# Altium PCB PCB1.PcbDoc
Units mm, origin at the board's own origin, x right, y up, seen from the top; angles counter-clockwise.
Board outline 50 x 50 mm, 2 copper layers (Top Layer, Bottom Layer); 19 components, 14 nets, 55 pads, 0 vias.
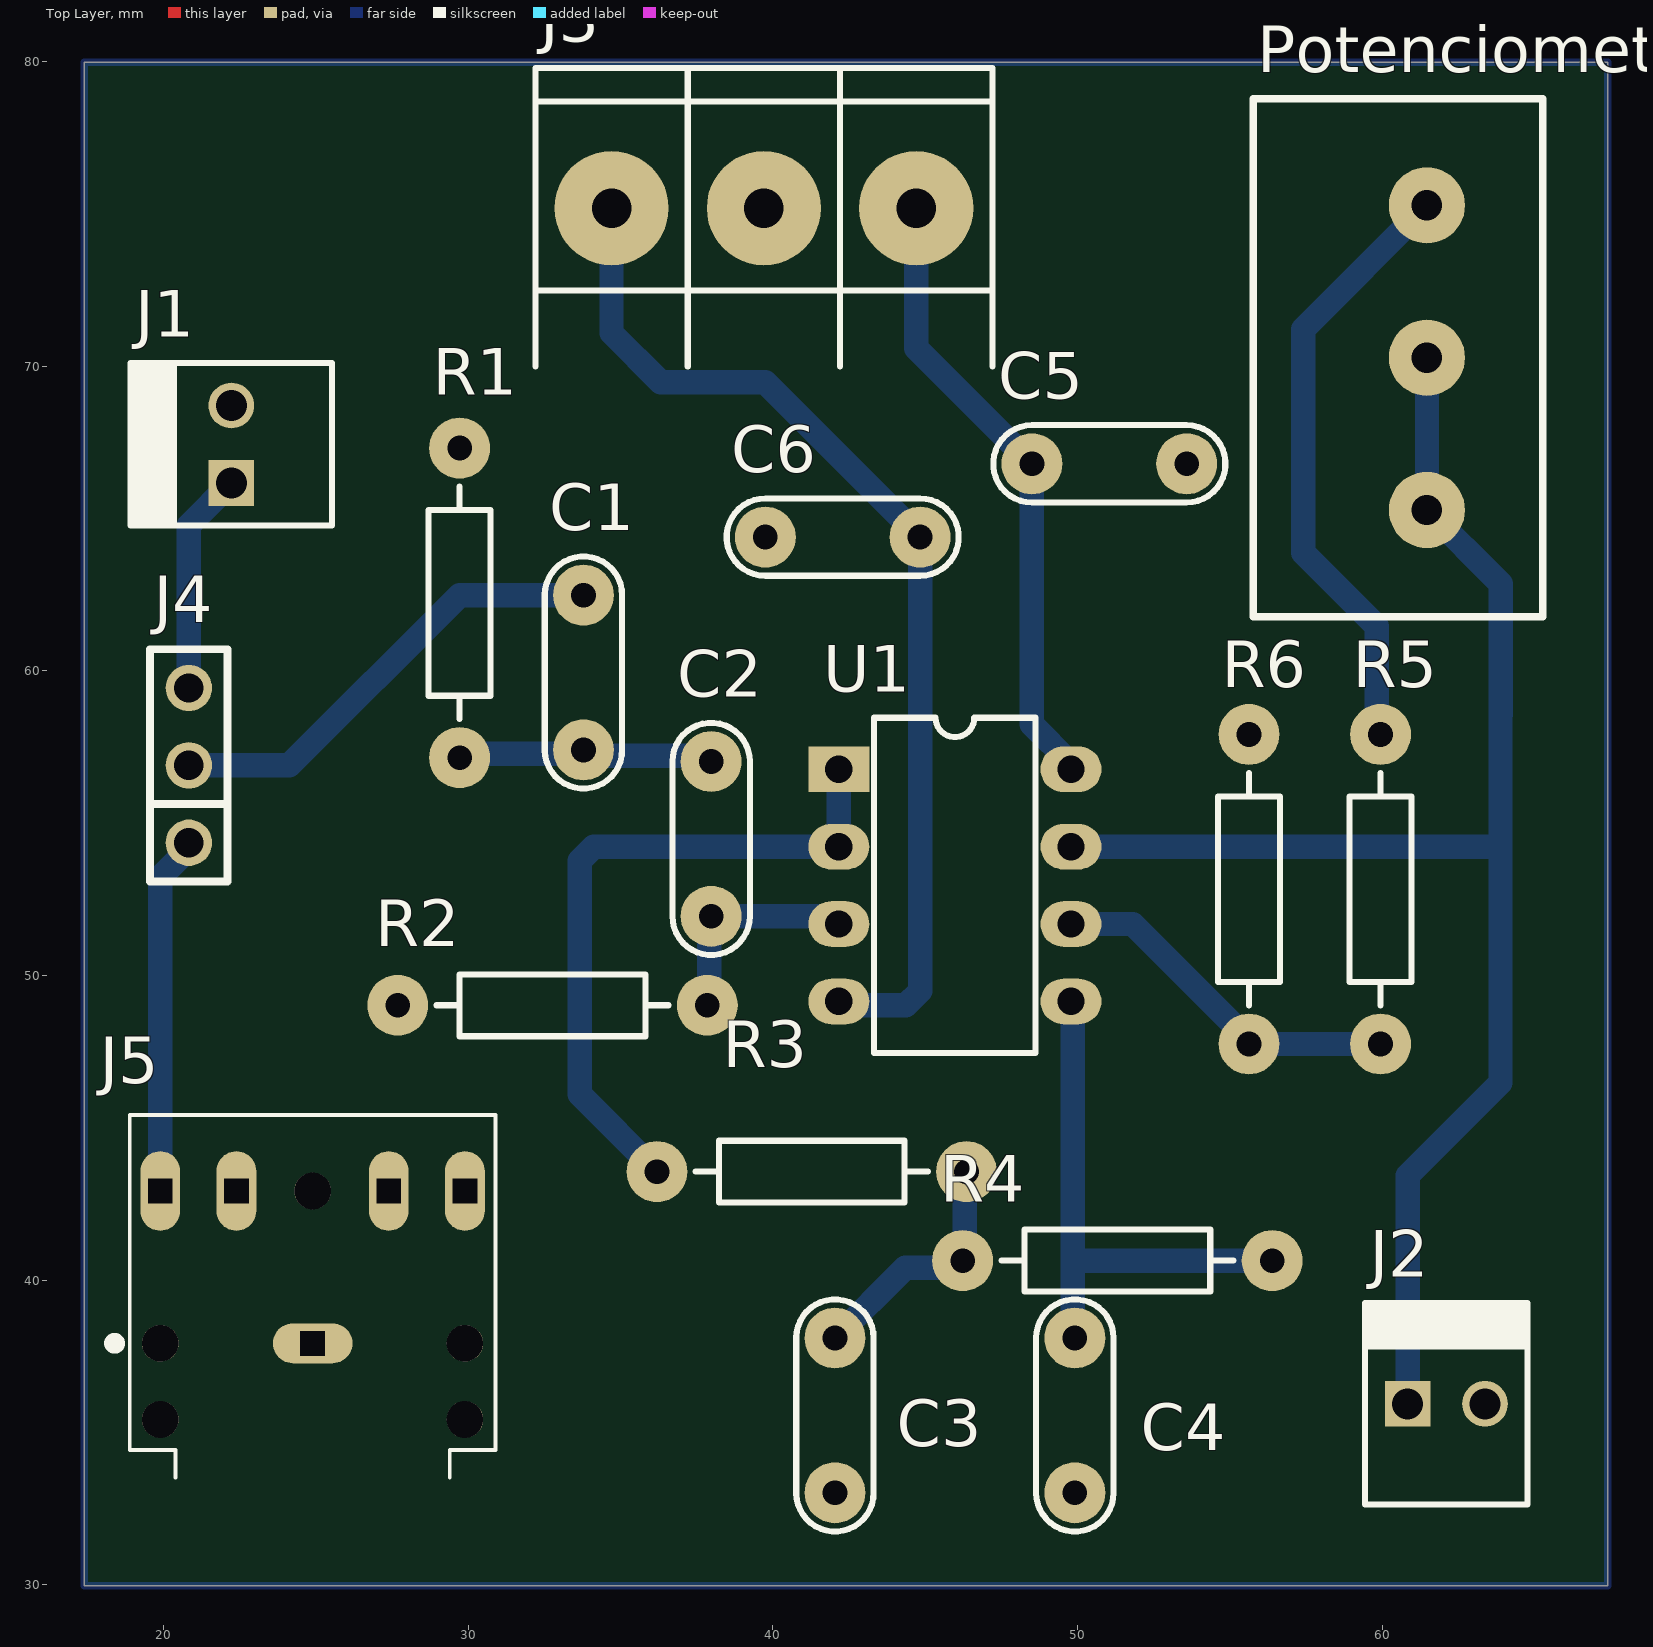
[diagram p0: Top Layer view]
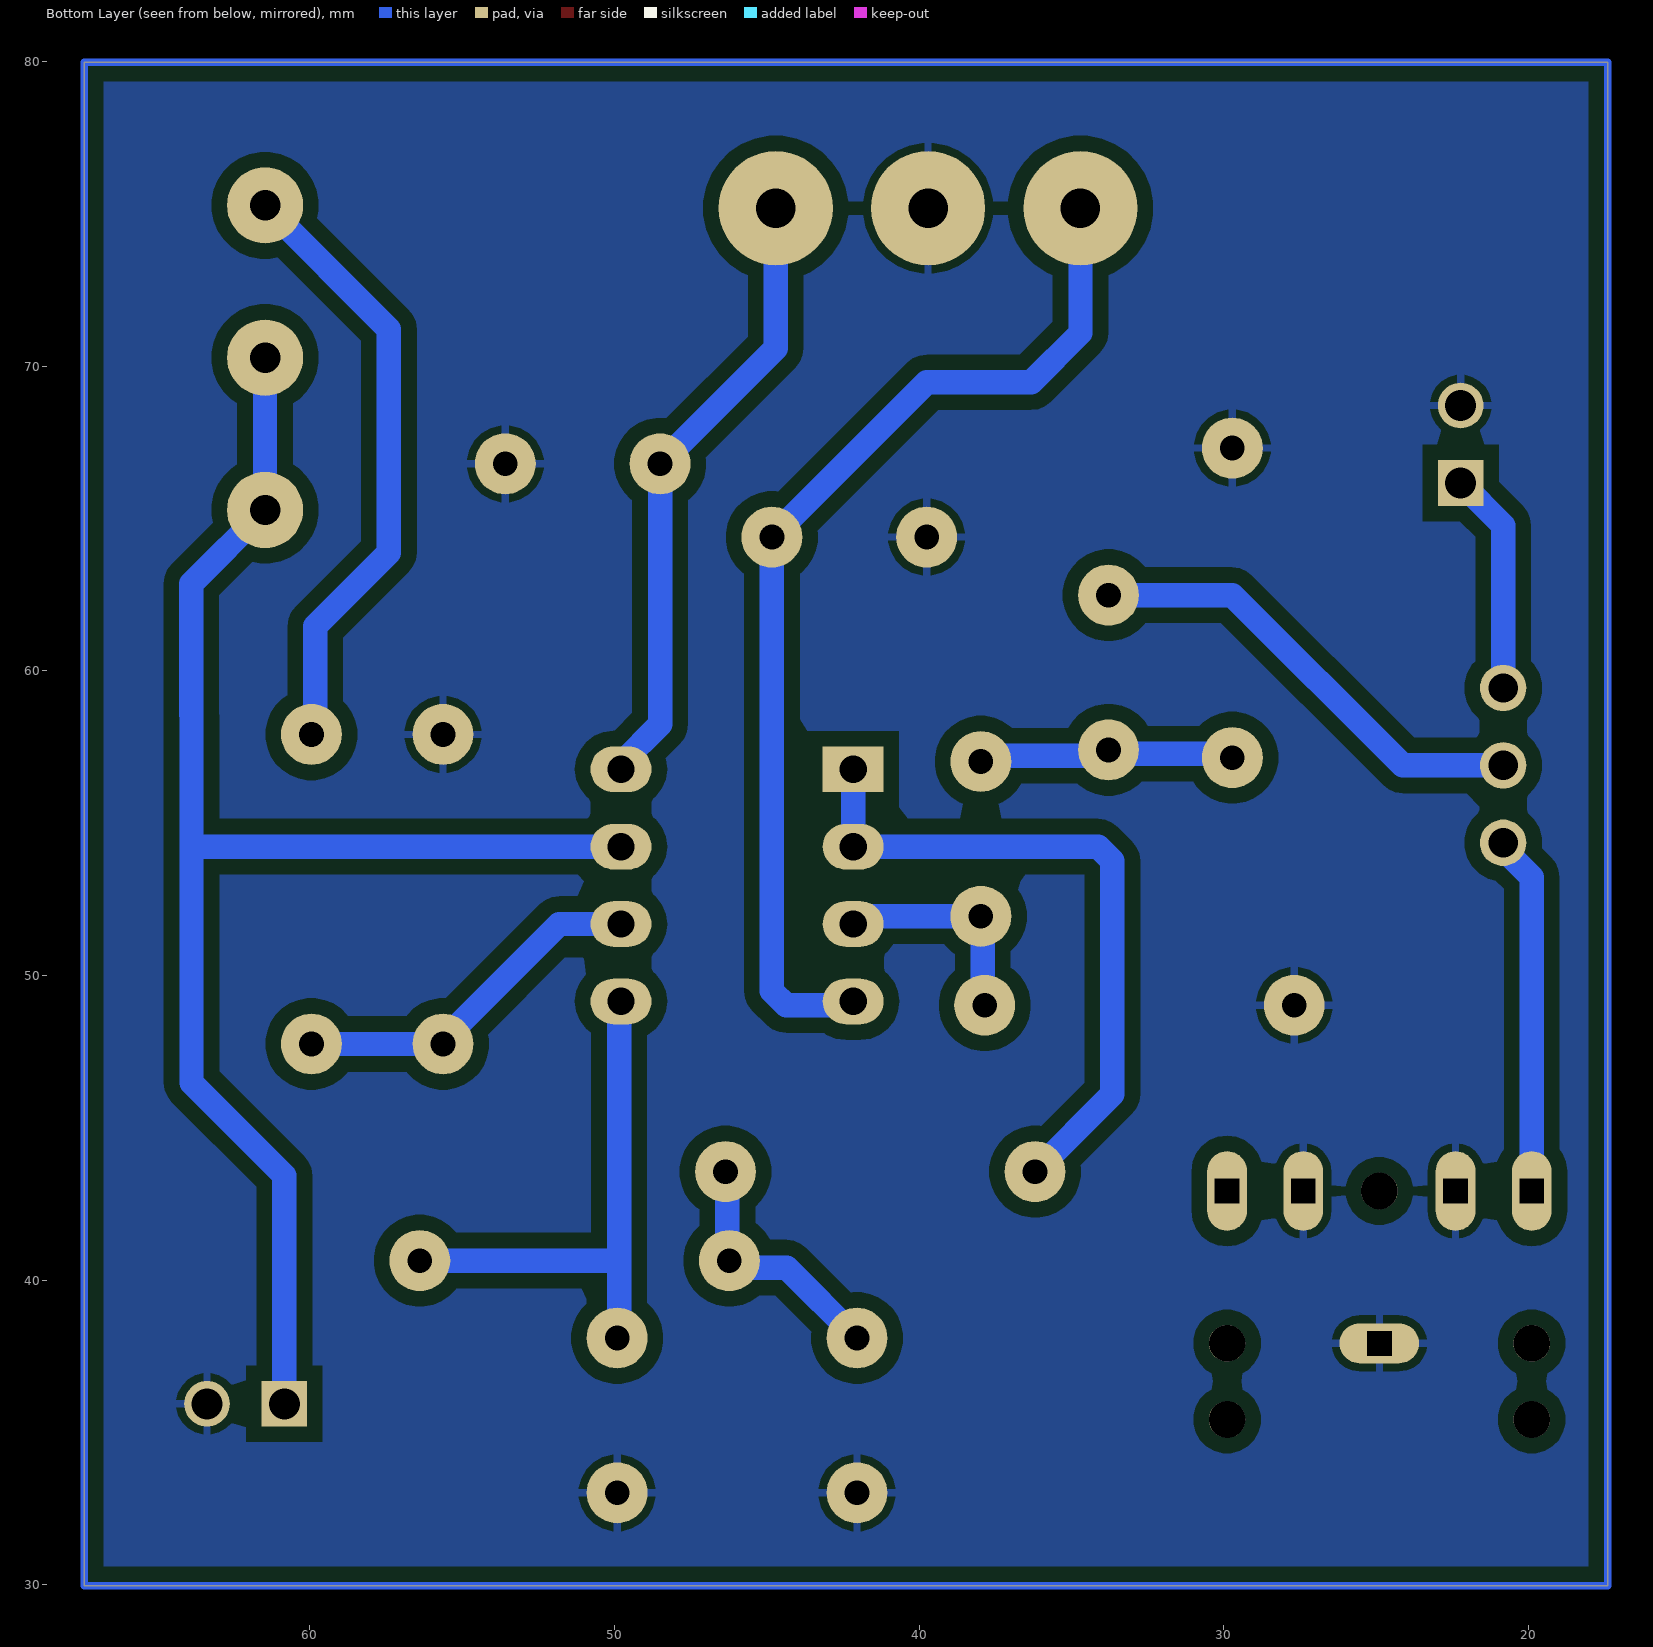
[diagram p1: Bottom Layer view, seen from below]
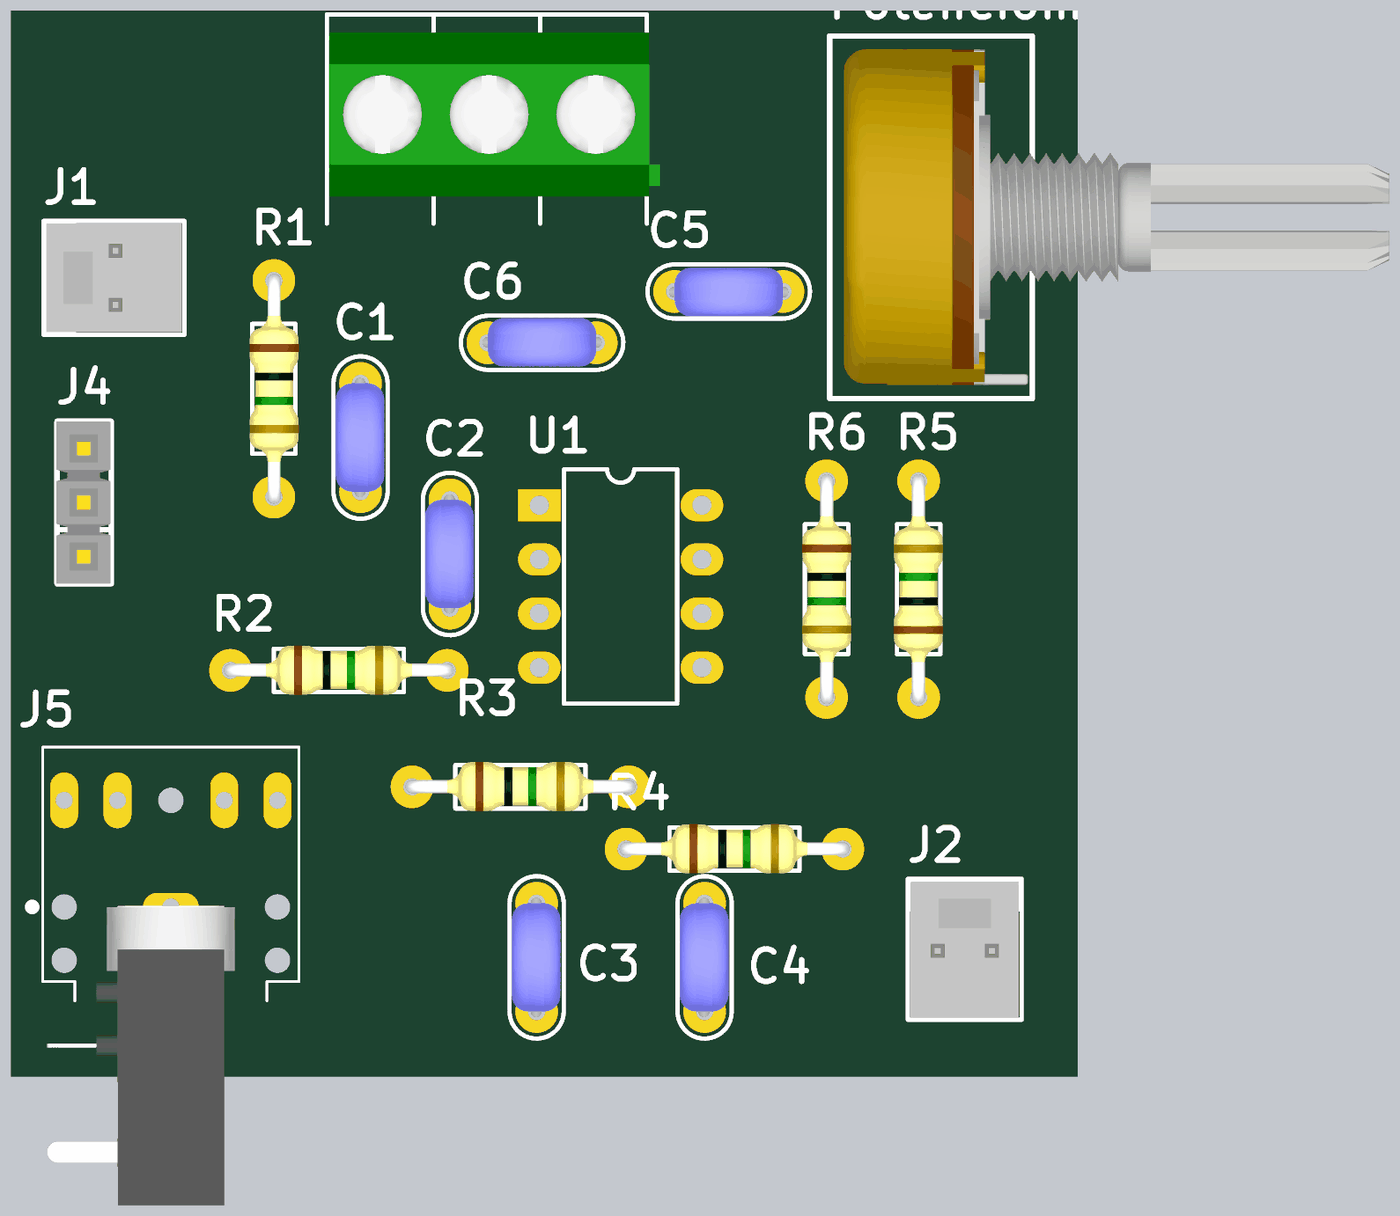
[diagram p2: 3D render of the assembled board from above, using the file's embedded part models]

## Layer stack, top to bottom
Top Solder: solder mask 0.0102, Solder Resist, Dk 3.5
Top Layer: signal copper 0.0356
Dielectric 1: dielectric 0.32, FR-4, Dk 4.8
Bottom Layer: signal copper 0.0356
Bottom Solder: solder mask 0.0102, Solder Resist, Dk 3.5

## Board outline
17.399,29.972 17.399,79.972 67.399,79.972 67.399,29.972

## Design rules (kind name [scope] priority, off if disabled: settings)
Clearance Clearance_GND [InPolygon] p1: gap=0.5 ignorepadtopadclearanceinfootprint=FALSE
Clearance [All] p2: gap=0.254 ignorepadtopadclearanceinfootprint=FALSE
PolygonConnect [All] p1: connectstyle=Relief reliefconductorwidth=0.254 reliefentries=4 polygonreliefangle="90 Angle" airgapwidth=0.254
RoutingVias [All] p1: holewidth=0.711 width=1.27 viastyle="Through Hole" minholewidth=0.711 minwidth=1.27 maxholewidth=0.711 maxwidth=1.27
SolderMaskExpansion [All] p1: expansion=0 istentingtop=FALSE
SupplyNets "Schematic Supply Nets" [InNet('GND')] p1: voltage=0.000
Width [All] p1: maxlimit=1.5 minlimit=0.5 preferedwidth=0.8 minimp=50.000000 maximp=50.000000 favimp=50.000000
30 further rules are at their usual default settings.

## Components (designator, comment, footprint, x,y, rotation, side; value= is the part's Value field where it differs from the comment)
C1 "100n" CAP200 33.782,59.944 r270 top
C2 "10n" CAP200 37.973,54.483 r270 top
C3 "10n" CAP200 42.037,35.56 r270 top
C4 "1n" CAP200 49.911,35.56 r270 top
C5 "100n" CAP200 51.041,66.794 r0 top
C6 "100n" CAP200 42.291,64.389 r180 top
J1 "MOLEX2" MOLEX2 22.225,66.167 r90 top
J2 "MOLEX2" MOLEX2 60.833,35.941 r0 top
J3 "BORNERA 3" BORNERA3 39.704,75.184 r270 top
J4 "JUMPER" JUMPER3TH 20.828,54.356 r180 top
J5 "SJ1-3525NG" CUI_SJ1-3525NG 24.892,37.926 r90 top
"Potenciometro 10K" "POTENCIOMETRO" POTENCIOMETRO 61.468,70.278 r90 top
R1 "15K" RES400 29.718,67.31 r270 top
R2 "150K" RES400 27.686,49.022 r0 top
R3 "2.2K" RES400 36.195,43.561 r0 top
R4 "22K" RES400 46.228,40.64 r0 top
R5 "4.7K" RES400 59.944,47.752 r90 top
R6 "10K" RES400 55.626,57.912 r270 top
U1 "TL082P" P008 45.974,52.959 r270 top

## Footprints (in the part's own frame and the unit in brackets; to place one, negate y for a bottom-side part, rotate by r counter-clockwise, add the part's x,y. Pads: shape width x height; smd on the part's side, far side on the other; paste and mask are expansions set on the pad)
BORNERA3 [mm] "Bornera con Tornillos 5mm separación"
  round 3.75 hole 1.3: 1(0,5) 2(0,0) 3(0,-5)
  silkscreen extent -4.6,-7.5 5.2,7.5, body extent -3.76,-7.39 3.94,8.11, height 10.05
CAP200 [mm]
  round 2 hole 0.813: 1(-2.54,0) 2(2.54,0)
  silkscreen extent -3.81,-1.27 3.81,1.27, body extent -2.79,-1.17 2.79,1.12, height 6.24
CUI_SJ1-3525NG [mm]
  oval 1.308x2.616 hole 0.8 square: 1(0,0)
  oval 2.616x1.308 hole 0.8 square: 2(5,-5) 3(5,5) 4(5,-2.5) 5(5,2.5)
  round 1.2 hole 1.2 unplated: ""(-2.5,5) ""(-2.5,-5) ""(0,5) ""(0,-5) ""(5,0)
  silkscreen extent -4.4,-6 7.5,6.67, body extent -14,-3 0.05,5.8, height 6
JUMPER3TH [mil]
  round 60 hole 38: 1(0,0) 2(0,-100) 3(0,-200)
  silkscreen extent -50,-250 50,50, body extent -49,-250 51,50, height 330
MOLEX2 [mm]
  rect 1.5x1.5 hole 1.016: 1(0,0)
  round 1.5 hole 1.016: 2(2.54,0)
  silkscreen extent -1.4,-3.3 3.94,3.3, body extent -1.27,-3.17 3.81,3.18, height 10.74
P008 [mm] "DIP; 8 Leads; Row Spacing 7.62 mm; Pitch 2.54 mm"
  rect 1.5x2 hole 0.9: 1(-3.81,-3.81)
  oval 1.5x2 hole 0.9: 2(-1.27,-3.81) 3(1.27,-3.81) 4(3.81,-3.81) 5(3.81,3.81) 6(1.27,3.81) 7(-1.27,3.81) 8(-3.81,3.81)
  silkscreen extent -5.5,-2.65 5.5,2.65
POTENCIOMETRO [mm]
  round 2.5 hole 1: 1(5,0) 2(0,0) 3(-5,0)
  silkscreen extent -8.5,-3.8 8.5,5.7, body extent -7.87,-20.53 7.87,5.03, height 20.12
RES400 [mm]
  round 2 hole 0.813: 1(0,0) 2(10.16,0)
  silkscreen extent 1.27,-1.02 8.89,1.02, body extent -0.3,-1.14 10.46,1.17, height 2.43

## Part data
C1 C2 C3 C4 C5 C6: library part CAP
J4: library part JUMPER3TH, "TIRA DE PINES 1x3"
J5: "3.5 mm, Stereo, Right Angle, Through Hole, Isolated Ground, 3 Conductors, 2 Internal Switches, Audio Jack Connector", Package=None, Check_prices=https://www.snapeda.com/parts/SJ1-3525NG/Same+Sky/view-part/?ref=eda, MF="Same Sky", MP=SJ1-3525NG, SnapEDA_Link=https://www.snapeda.com/parts/SJ1-3525NG/Same+Sky/view-part/?ref=snap
R1 R2 R3 R4 R5 R6: library part RES
U1: "JFET-Input Operational Amplifier", Code_JEDEC=MO-001-AN, ComponentLink1Description="Manufacturer Link", ComponentLink1URL=http://www.ti.com/, ComponentLink2Description=Datasheet, ComponentLink2URL=http://www-s.ti.com/sc/ds/tl082.pdf, DatasheetVersion=Feb-1999, LatestRevisionDate=04-Mar-2005, LatestRevisionNote="Stylized 3D Model Added.", PackageDescription="DIP; 8 Leads; Row Spacing 7.62 mm; Pitch 2.54 mm", PackageReference=P008, PackageVersion=Jun-1999, Published=16-Jan-2001, Publisher="Altium Limited"

## Nets (pads, with @x,y where several pads share a name; then routed paths per layer and width w, separated by ;. In a path a pad name is that pad's centre, name@x,y a point inside that pad or via, vN(x,y) a via of type N, cw(c..) or ccw(c..) an arc to the next point about the centre after c; other vN are vias at no path point)
+15V: C5.1 J3.1 U1.8 | length 20.5
  Bottom Layer w0.8: J3.1 44.704,70.591 C5.1 48.501,58.241 49.784,56.958 U1.8
-15V: C6.1 J3.3 U1.4 | length 34.8
  Bottom Layer w0.8: J3.3 34.704,71.087 36.322,69.469 39.751,69.469 C6.1 44.831,49.491 44.362,49.022 42.291,49.022 U1.4
GND: C3.2 C4.2 C5.2 C6.2 J1.2 J2.2 J3.2 J5.1 J5.4 J5.5 R1.1 R2.1 R6.1 | length 2.5
  Bottom Layer w0.8: J5.5@22.392,42.28 J5.5 J5.5@22.392,43.184 ; J5.1 J5.1@25.66,37.926 ; J5.4 J5.4@27.432,42.886 ; R2.1@27.559,48.895 R2.1 ; R1.1 R1.1@29.845,67.183 ; C3.2@42.037,32.81 C3.2 ; C5.2@53.581,66.584 C5.2 ; R6.1@55.605,57.933 R6.1
NetC1_1: C1.1 J4.2 | length 15.3
  Bottom Layer w0.8: J4.2 24.13,56.896 29.718,62.484 C1.1
NetC1_2: C1.2 C2.1 R1.2 | length 8.5
  Bottom Layer w0.8: R1.2 29.845,57.277 33.655,57.277 C1.2 33.972,57.213 37.782,57.213 C2.1
NetC2_2: C2.2 R2.2 U1.3 | length 7.3
  Bottom Layer w0.8: R2.2 37.91,49.085 37.91,51.88 C2.2 41.721,51.943 41.975,51.689 U1.3
NetC3_1: C3.1 R3.2 R4.1 | length 8.2
  Bottom Layer w0.8: C3.1 44.347,40.41 45.998,40.41 R4.1 46.291,40.703 46.291,43.497 R3.2
NetC4_1: C4.1 R4.2 U1.5 | length 17.7
  Bottom Layer w0.8: U1.5 49.847,49.085 49.847,40.513 ; C4.1 49.847,38.163 49.847,40.513 ; R4.2 49.974,40.64 49.847,40.513
NetJ4_1: J4.1 J5.3 | length 11.8
  Bottom Layer w0.8: J5.3 19.892,53.224 20.828,54.16 J4.1
"NetPotenciometro 10K_1": "Potenciometro 10K.1" R5.2 | length 20.1
  Bottom Layer w0.8: R5.2 59.817,58.039 59.817,61.468 57.404,63.881 57.404,71.214 61.468,75.278
NetR3_1: R3.1 U1.1 U1.2 | length 22.5
  Bottom Layer w0.8: R3.1 33.655,46.101 33.655,53.76 34.124,54.229 U1.2 U1.1
NetR5_1: R5.1 R6.2 U1.6 | length 11.9
  Bottom Layer w0.8: U1.6 51.816,51.689 55.626,47.879 R6.2 R5.1
Vin: J1.1 J4.3 | length 7.3
  Bottom Layer w0.8: J4.3 20.828,64.77 J1.1
Vout: "Potenciometro 10K.2" "Potenciometro 10K.3" J2.1 U1.7 | length 50.8
  Bottom Layer w0.8: U1.7 63.754,54.229 63.881,54.102 ; J2.1 60.833,43.434 63.881,46.482 63.881,54.102 ; 61.468,70.278 61.468,65.278 63.888,62.858 63.888,58.554 63.881,58.547 63.881,54.102
pads on no net: J5. J5.2
copper on no net: | length 200
  Bottom Layer w0.254: 17.399,29.972 67.399,29.972 67.399,79.972 17.399,79.972 17.399,29.972

## Polygon pours and split planes (outlines as drawn)
GND on Bottom Layer "NONET_L-01_P-001" (solid, pour order 0): 17.399,79.972 67.399,79.972 67.399,29.972 17.399,29.972

## Text inside footprints (layer, text, board x,y; h text height)
J5: Mechanical 13 "PCB edge" at 18.88,25.401 h1.02 r90